# Altium PCB main.PcbDoc
Units mm, origin at the board's own origin, x right, y up, seen from the top; angles counter-clockwise.
Board outline 20.01 x 24.12 mm, 2 copper layers (Top Layer, Bottom Layer); 19 components, 18 nets, 85 pads, 23 vias.
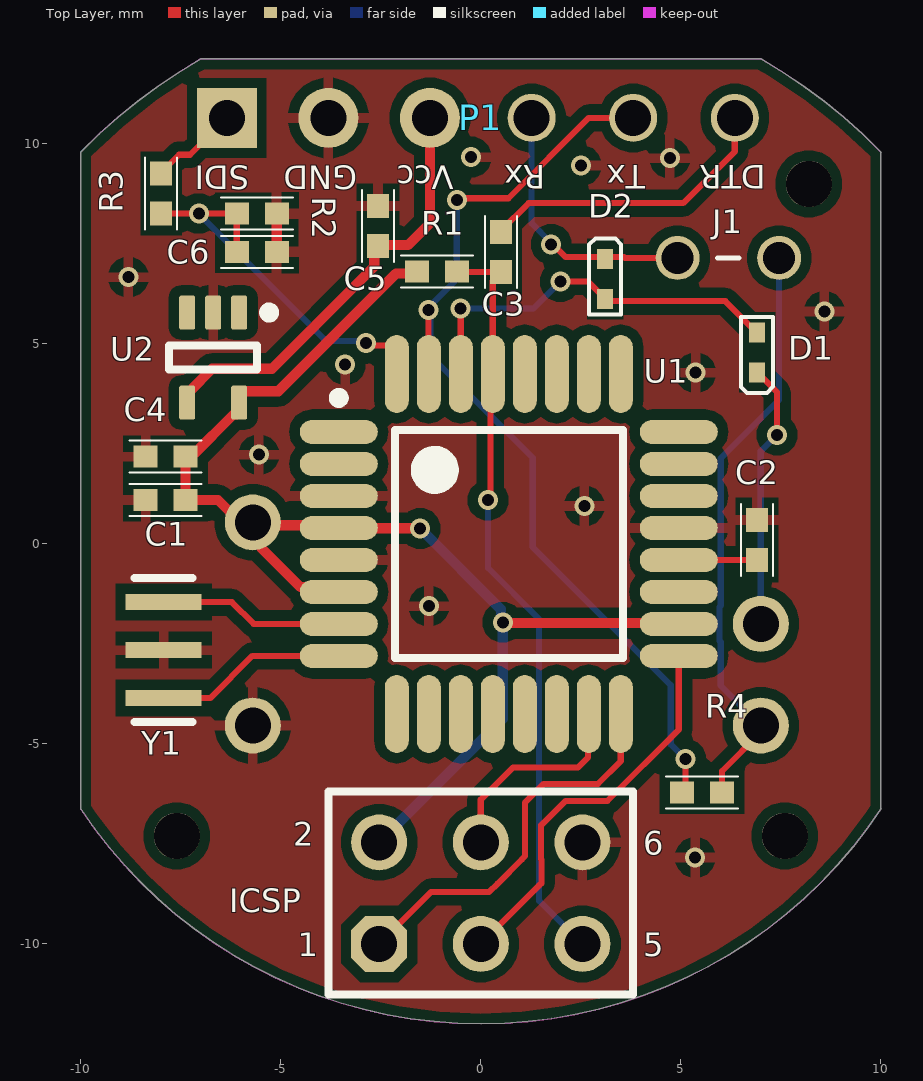
[diagram p0: Top Layer view]
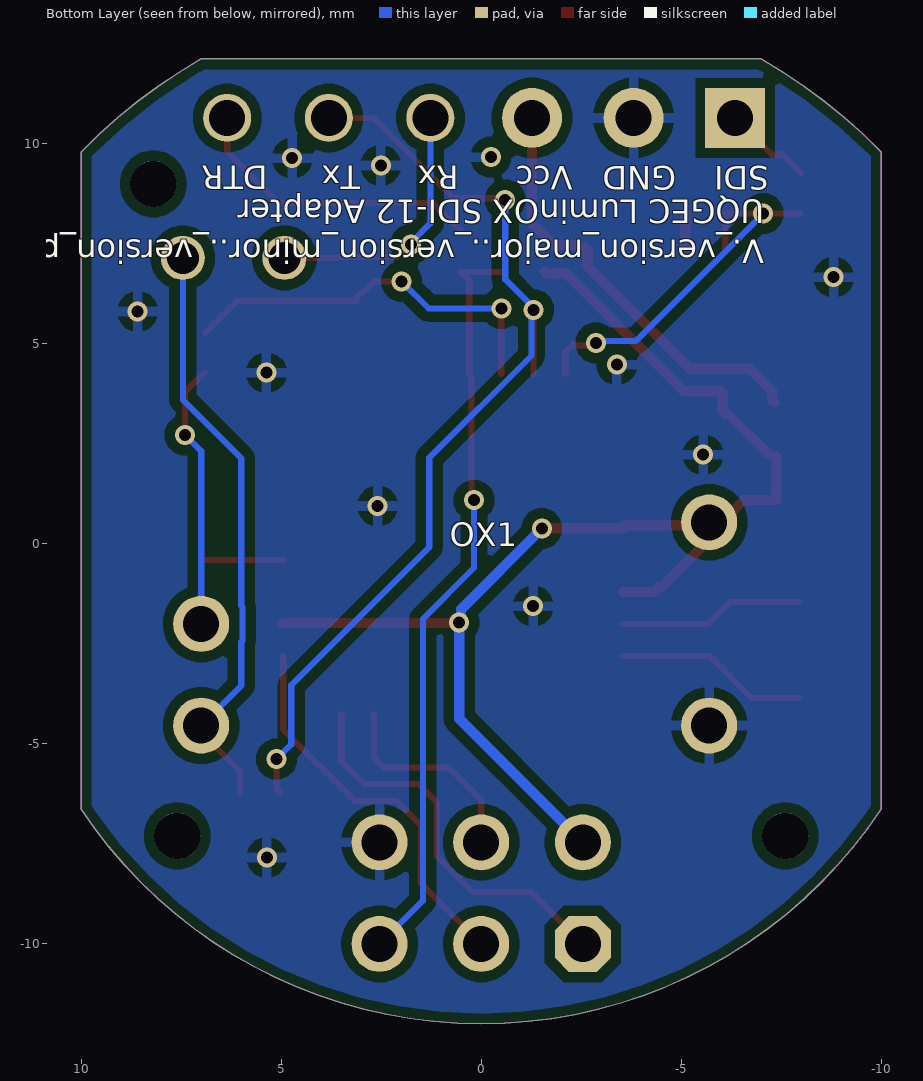
[diagram p1: Bottom Layer view, seen from below]
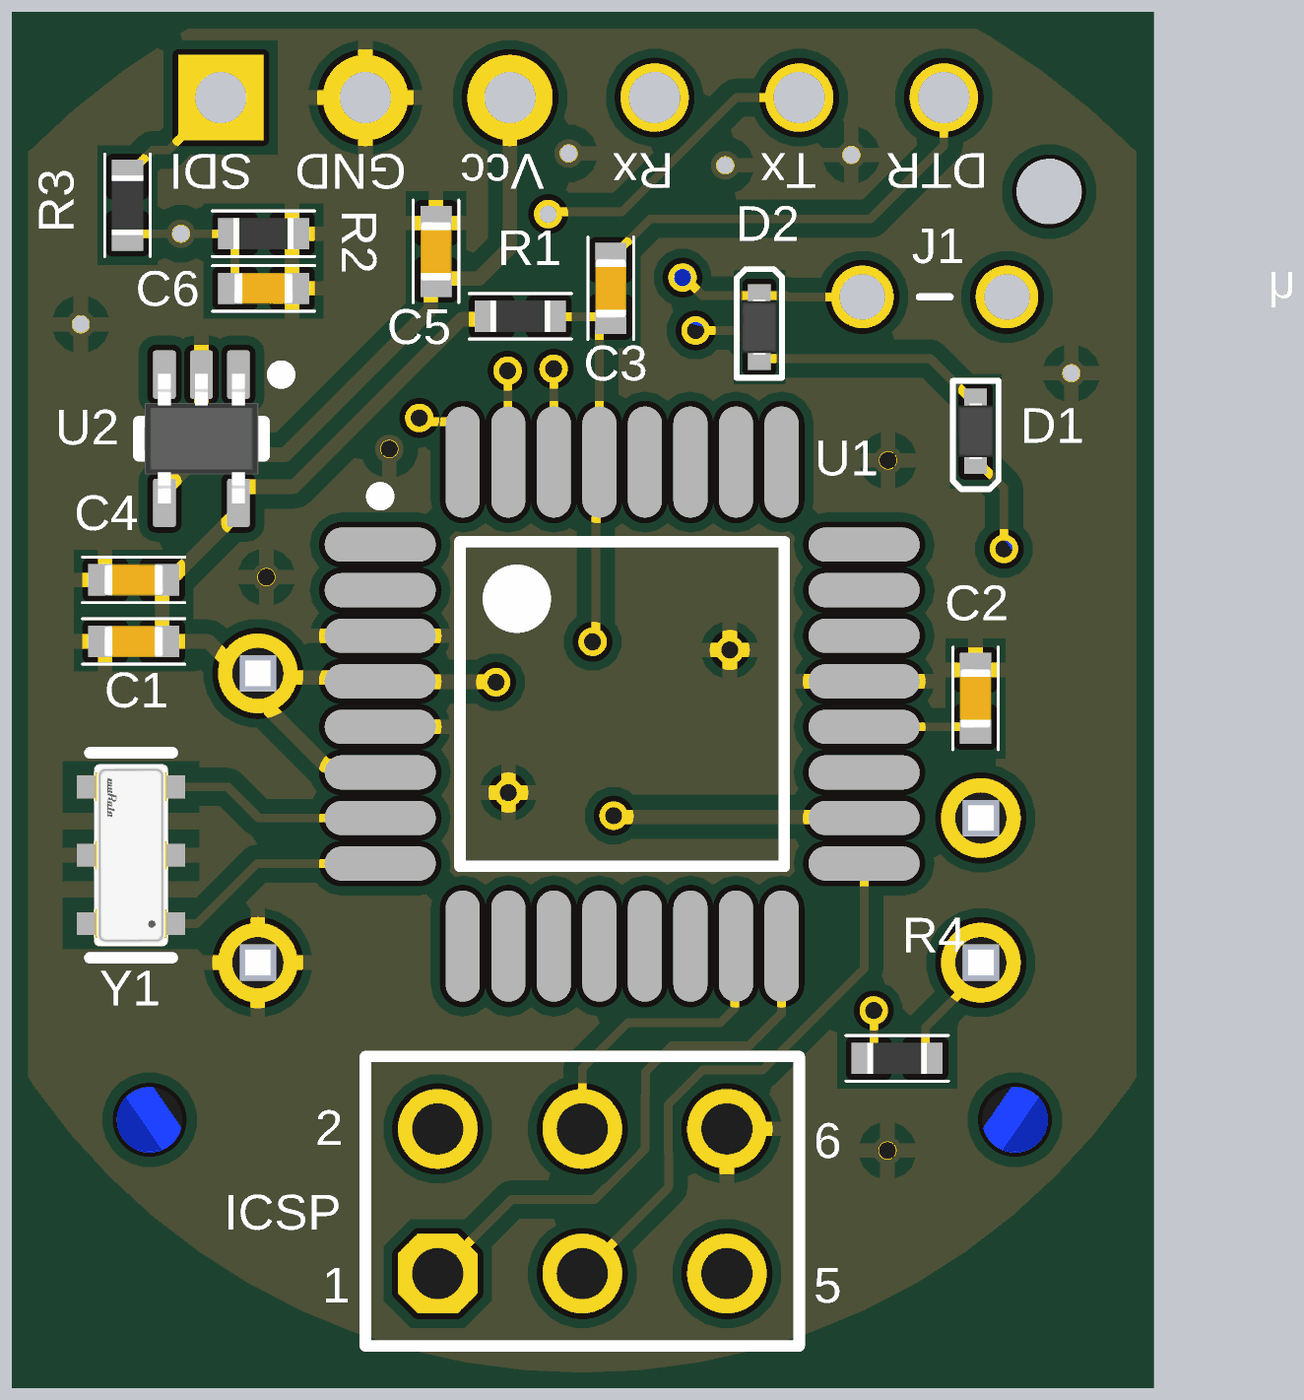
[diagram p2: 3D render of the assembled board from above, using the file's embedded part models]

## Layer stack, top to bottom
Top Solder: solder mask 0.0102, Solder Resist, Dk 3.5
Top Layer: signal copper 0.0356
Dielectric 1: dielectric 0.32, FR-4, Dk 4.8
Bottom Layer: signal copper 0.0356
Bottom Solder: solder mask 0.0102, Solder Resist, Dk 3.5

## Board outline
-9.996,-6.629 ccw(c0.004,0.004) 10.01,-6.62 10.004,-6.615 10.004,9.798 10.008,9.798 ccw(c0.004,0.004) 7.004,12.128 -6.996,12.128 ccw(c0.004,0.004) -9.996,9.802

## Design rules (kind name [scope] priority, off if disabled: settings)
Clearance [All] p1: gap=0.254 ignorepadtopadclearanceinfootprint=TRUE except(0: Arc-Hole Track-Hole SMDPad-Hole THPad-Hole Via-Hole Fill-Hole Poly-Hole Region-Hole Text-Hole)
HoleSize [All] p1: absolutevalues=TRUE maxlimit=6.3 minlimit=0.3 maxpercent=80.000 minpercent=20.000
PlaneConnect [All] p1: planeconnectstyle=Relief reliefexpansion=0.508 reliefentries=4 reliefconductorwidth=0.3 reliefairgap=0.254
PolygonConnect [All] p1: connectstyle=Relief reliefconductorwidth=0.254 reliefentries=4 polygonreliefangle="90 Angle" airgapwidth=0.254
RoomDefinition main [InComponentClass('main')] p1: confinementstyle=ConfineIn formatcopy=TRUE lockcomponents=FALSE outline -10.318,-12.318 -10.318,8.317 -8.719,8.317 -8.719,9.939 -7.456,9.939 -7.456,11.756 7.306,11.756 7.306,8.317 10.318,8.317 10.318,-12.318
RoutingVias [All] p1: holewidth=0.3 width=0.6 viastyle="Through Hole" minholewidth=0.3 minwidth=0.5 maxholewidth=1 maxwidth=2
SolderMaskExpansion [All] p1: expansion=0.102 istentingtop=FALSE
UnConnectedPin [All] p1:
UnRoutedNet [All] p1: checkbadconnections=TRUE
Width [All] p1: maxlimit=5 minlimit=0.152 preferedwidth=0.305 minimp=50.000000 maximp=50.000000 favimp=50.000000
27 further rules are at their usual default settings.

## Components (designator, comment, footprint, x,y, rotation, side; value= is the part's Value field where it differs from the comment)
C1 "100nF" C0402_CAPC1005X06N -7.88,1.1 r0 top
C2 "100nF" C0402_CAPC1005X06N 6.907,0.1 r270 top
C3 "100nF" C0402_CAPC1005X06N 0.5,7.3 r270 top
C4 "470nF" C0402_CAPC1005X06N -7.88,2.18 r0 top
C5 "100nF" C0402_CAPC1005X06N -2.57,7.95 r270 top
C6 "220pF" C0402_CAPC1005X06N -5.6,7.3 r0 top
D1 "D Schottky" SOD923_SODFL98X40-2N 6.91,4.79 r90 top
D2 "D Schottky" SOD923_SODFL98X40-2N 3.11,6.62 r270 top
ICSP "ICSP" HDR2X3 -2.54,-10 r0 top
J1 "" HDR1X2 4.92,7.15 r0 top
OX1 "LOX-02-S" LOX-02-S 0,-2 r180 bottom locked
P1 "FTDI" HDR1X6 -6.35,10.65 r0 top
R1 "10K" R0402-RESC1005X04N -1.09,6.81 r180 top
R2 "160K" R0402-RESC1005X04N -5.6,8.26 r180 top
R3 "160K" R0402-RESC1005X04N -7.99,8.76 r90 top
R4 "1K" R0402-RESC1005X04N 5.53,-6.22 r0 top
U1 "ATmega328P-AU" 32A_M 0.7,0 r0 top
U2 "TPS71550DCKR" DCK0005A_N -6.69,4.66 r270 top
Y1 "CSTNE16M0V530000R0" FP-CSTNE16M0V530000R0-MFG -7.927,-2.654 r270 top

## Footprints (in the part's own frame and the unit in brackets; to place one, negate y for a bottom-side part, rotate by r counter-clockwise, add the part's x,y. Pads: shape width x height; smd on the part's side, far side on the other; paste and mask are expansions set on the pad)
32A_M [mm] "Thin QFP, 32-Leads, Body 7x7mm, Pitch 0.8mm, IPC Low Density"
  oval 1.95x0.6 smd: 1(-4.25,2.8) 2(-4.25,2) 3(-4.25,1.2) 4(-4.25,0.4) 5(-4.25,-0.4) 6(-4.25,-1.2) 7(-4.25,-2) 8(-4.25,-2.8) 17(4.25,-2.8) 18(4.25,-2) 19(4.25,-1.2) 20(4.25,-0.4) 21(4.25,0.4) 22(4.25,1.2) 23(4.25,2) 24(4.25,2.8)
  oval 0.6x1.95 smd: 9(-2.8,-4.25) 10(-2,-4.25) 11(-1.2,-4.25) 12(-0.4,-4.25) 13(0.4,-4.25) 14(1.2,-4.25) 15(2,-4.25) 16(2.8,-4.25) 25(2.8,4.25) 26(2,4.25) 27(1.2,4.25) 28(0.4,4.25) 29(-0.4,4.25) 30(-1.2,4.25) 31(-2,4.25) 32(-2.8,4.25)
  silkscreen extent -4.37,-2.85 2.85,3.77, body extent -3.5,-3.5 3.5,3.5, height 1.2
C0402_CAPC1005X06N [mm] "Chip Capacitor 0402 (Metric 1005), 2-Leads, Body 1.00x0.50mm, IPC Medium Density"
  rect 0.6x0.55 smd: 1(-0.5,0) 2(0.5,0)
  silkscreen extent -0.9,-0.4 0.9,0.4, body extent -0.53,-0.28 0.53,0.28, height 0.55
DCK0005A_N [mm] "SOT23, 5-Leads, Body 2.15x1.4mm, Pitch 0.65mm, IPC Medium Density"
  rrect25% 0.85x0.4 smd: 1(-1.125,0.65) 2(-1.125,0) 3(-1.125,-0.65) 4(1.125,-0.65) 5(1.125,0.65)
  silkscreen extent -1.25,-1.1 0.3,1.53, body extent -1.14,-1 1.14,1, height 0.94
FP-CSTNE16M0V530000R0-MFG [mm]
  rect 0.4x1.9 smd paste+0 mask+0: 1(1.2,0) 2(0,0) 3(-1.2,0)
  silkscreen extent -1.8,-0.72 1.8,0.73, body extent -1.78,-1.05 1.78,1.05, height 0.25
HDR1X2 [mm] "Connector; Header; 2 Position"
  round 1.1 hole 0.8: 1(0,0) 2(2.54,0)
HDR1X6 [mm] "Connector; Header; 6 Position"
  rect 1.5x1.5 hole 0.9: 1(0,0)
  round 1.5 hole 0.9: 2(2.54,0) 3(5.08,0)
  round 1.2 hole 0.9: 4(7.62,0) 5(10.16,0) 6(12.7,0)
HDR2X3 [mm] "Connector; Header; 3x2 Position"
  oct 1.4x1.4 hole 0.9: 1(0,0)
  round 1.4 hole 0.9: 2(0,2.54) 3(2.54,0) 4(2.54,2.54) 5(5.08,0) 6(5.08,2.54)
  silkscreen extent -1.27,-1.27 6.35,3.81
LOX-02-S [mm] "LuminOX Oxygen Serial (UART) Sonsor Footprint"
  round 1.4 hole 0.9 paste+0: 1(5.7,2.54) 2(5.7,-2.54) 3(-7,0) 4(-7,-2.54)
  body extent -9.95,-9.95 9.95,9.95, height 14.05
R0402-RESC1005X04N [mm] "Chip Resistor 0402 (Metric 1005), 2-Leads, Body 1.00x0.50mm, IPC Medium Density"
  rect 0.6x0.55 smd: 1(-0.5,0) 2(0.5,0)
  silkscreen extent -0.9,-0.4 0.9,0.4, body extent -0.53,-0.28 0.53,0.28, height 0.4
SOD923_SODFL98X40-2N [mm] "SODFL, 2-Leads, Body 0.60x0.98mm, IPC Medium Density"
  rect 0.5x0.4 smd: 1(0.5,0) 2(-0.5,0)
  silkscreen extent -1.02,-0.4 0.89,0.4, body extent -0.49,-0.33 0.49,0.33, height 0.4

## Part data
C1 C2 C3 C4 C5 C6: library part "Cap Semi", "Capacitor (Semiconductor SIM Model)", LatestRevisionDate=29-May-2009, LatestRevisionNote="IPC-7351 Footprint Added.", PackageDescription="Chip Capacitor", PackageReference=C1206, Published=8-Jun-2000, Publisher="Altium Limited"
D1 D2: "DIODESCHOTTKY30V100MAVMN2M", Average Rectified Current=100mA, Case/Package=SMD/SMT, Manufacturer=Rohm, Manufacturer Part Number=RB521CM-30T2R, Max Reverse Voltage (DC)=30V, Supplier Part Number 1=755-RB521CM-30T2R, Category="Rectifier Diodes", Code_JEDEC=DO-214-AA, ComponentLink1Description=http://www.mouser.com/ds/2/348/rb521cm-30-e-907574.pdf?src-supplier=Mouser, ComponentLink1URL=http://www.mouser.com/ds/2/348/rb521cm-30-e-907574.pdf?src-supplier=Mouser, ComponentLink2Description=http://www.farnell.com/datasheets/2644371.pdf?src-supplier=Farnell, ComponentLink2URL=http://www.farnell.com/datasheets/2644371.pdf?src-supplier=Farnell, ComponentLink3Description=http://www.rohm.com/web/global/datasheet/RB521CM-30/rb521cm-30t2r-e?src-supplier=Digikey, ComponentLink3URL=http://www.rohm.com/web/global/datasheet/RB521CM-30/rb521cm-30t2r-e?src-supplier=Digikey, ComponentLink4Description=http://www.farnell.com/datasheets/2644371.pdf?src-supplier=Newark, ComponentLink4URL=http://www.farnell.com/datasheets/2644371.pdf?src-supplier=Newark, ComponentLink5Description=https://www.rohm.com/datasheet/RB521CM-30/rb521cm-30t2r-e?src-supplier=Digikey, ComponentLink5URL=https://www.rohm.com/datasheet/RB521CM-30/rb521cm-30t2r-e?src-supplier=Digikey, LatestRevisionDate=17-Jul-2002, LatestRevisionNote="Re-released for DXP Platform.", Mount="Surface Mount", Number of Pins=2, PackageDescription="DO-214-AA/SMB; 2 C-Bend Leads; Body 5.3 x 3.6 mm, inc. leads (LxW)", PackageReference=SMB, Packaging="Cut Tape", Pricing 1="1=0.2, 10=0.143, 50=0.143, 100=0.087, 1000=0.062, 10000=0.04 (USD)", Published=8-Jun-2000, Publisher="Altium Limited", RoHS=Yes, RoHS Compliant=Yes, Series=-, Stock 1=103883, Supplier 1=Mouser
ICSP: library part "Header 3X2", "Header, 3-Pin, Dual row", LatestRevisionDate=17-Jul-2002, LatestRevisionNote="Re-released for DXP Platform.", Publisher="Altium Limited"
J1: library part "Header 2", "Jumper to short FTDI TX to LuminOX RX to initiate Polling mode for initial MCU programming", LatestRevisionDate=17-Jul-2002, LatestRevisionNote="Re-released for DXP Platform.", Publisher="Altium Limited"
OX1: "LuminOx optical oxygen sensor; range: 25%; supply: 4.5-5.5VDC; working temperature: -30+60 deg.C; response time: 30s;...", Manufacturer="SST Sensing", Manufacturer Part Number=LOX-02-S, Pricing 1="1=138.36, 10=120.95, 50=115.92, 100=115.92, 1000=115.92, 10000=115.92 (USD)", Stock 1=5, Supplier 1=Mouser
P1: library part "Header 6", "Header, 6-Pin", LatestRevisionDate=17-Jul-2002, LatestRevisionNote="Re-released for DXP Platform.", Publisher="Altium Limited"
R1 R2 R3 R4: library part "Res Semi", "Semiconductor Resistor", LatestRevisionDate=17-Jul-2002, LatestRevisionNote="Re-released for DXP Platform.", PackageDescription="Axial Device, Thru-Hole; 2 Leads; 0.5 in Pin Spacing", PackageReference=AXIAL-0.5, Published=8-Jun-2000, Publisher="Altium Limited"
U1: library part CMP-0095-00269-2, "8-bit AVR Microcontroller, 32KB Flash, 1KB EEPROM, 2KB SRAM, 32-pin TQFP, Industrial Grade (-40°C to 85°C)", Code_JEDEC=MS-026-ABA, ComponentLink1Description="Manufacturer URL", ComponentLink1URL=http://www.atmel.com/, ComponentLink2Description="ATmega48A/48PA/88A/88PA/168A/168PA/328/328P Datasheet", ComponentLink2URL=http://www.atmel.com/dyn/resources/prod_documents/doc8271.pdf, ComponentLink3Description="ATmega48A/48PA/88A/88PA/168A/168PA/328/328P Summary", ComponentLink3URL=http://www.atmel.com/dyn/resources/prod_documents/8271S.pdf, DatasheetVersion="revD, May-2011", PackageDescription="32-Lead, 7x7x1.0 mm Body, 0.8mm Lead Pitch, Thin Profile Plastic Quad Flat Package (TQFP)", PackageReference=32A, PackageVersion="revC, Oct-2010", RevisionNote="DatasheetVersion & PackageVersion updated. URLs added."
U2: library part CMP-0394-00921-2, "Single Output LDO, 50 mA, Fixed 5 V Output, 3 to 24 V Input, 5-pin SC70 (DCK), -40 to 85 degC, Green (RoHS & no Sb/Br)", Manufacturer="Texas Instruments", Accuracy(%)=4, Code_JEDEC=MO-203, ComponentLink1Description="Manufacturer URL", ComponentLink1URL=http://www.ti.com/, ComponentLink2Description=Datasheet, ComponentLink2URL=http://www.ti.com/general/docs/lit/getliterature.tsp?genericPartNumber=TPS71550&fileType=pdf, ComponentLink3Description="Package Specification", ComponentLink3URL=http://www.ti.com/litv/pdf/mpds025f, DatasheetVersion=SLVS338P, Eco-Plan="Green (RoHS & no Sb/Br)", Fixed Output Options(V)=5, Iout(Max)(A)=0.05, Iq(Typ)(mA)=0.003, Mounting Technology="Surface Mount", PackageDescription="5-Pin Plastic Small-Outline, Body 2 x 1.25 mm, Pitch 0.65 mm", PackageReference=DCK0005A, PackageVersion=4093553-3/G, PartNumber=TPS71550DCKR, SubFamily="Single Channel LDO", Vdo(Typ)(mV)=415, Vin(Max)(V)=24, Vin(Min)(V)=3, Vout Adj(Max)(V)=5, Vout Adj(Min)(V)=5
Y1: library part CMP-06054-000001-1, "CERAMIC RES 16.0000MHZ 15PF SMD", Frequency=16MHz, Load Capacitance=15pF, Manufacturer=Murata, Package=0, Temperature="-40°C to +85°C", Temperature Range High=+85°C, Temperature Range Low=-40°C, Tolerance=0.5%, Automotive=No, Category=Crys, ComponentLink2Description=Datasheet, ComponentLink2URL=https://www.murata.com/en-sg/products/productdata/8801162231838/SPEC-CSTNE16M0V530000R0.pdf?1545967809000, Device Class L1="Passive Components", Device Class L2="Crystals / Oscillators", Device Class L3=Crystals, Digikey Description="CERAMIC RES 16.0000MHZ 15PF SMD", Esr=40Ω, Height=1mm, Lead Free=Yes, Manufacturer Part Number=CSTNE16M0V530000R0, Mouser Description="Ceramic Resonator 16MHz ±0.5% (Tol) ±0.3% (Stability) 15pF 40Ohm 3-Pin CSMD T/R", Octopart=https://octopart.com/cstne16m0v530000r0-murata-91406924, RoHS=TRUE, Series=CSTNE_V, Stability=0.3%

## Free pads (board coordinates)
  round 1.152 hole 1.152 unplated mask+0.074: ""(-7.6,-7.3) ""(7.6,-7.3) ""(8.2,9)

## Via types
v1: diameter 0.5, hole 0.3, Top Layer to Bottom Layer, 11 vias
v2: diameter 0.5, hole 0.3, Top Layer to Bottom Layer, tented both sides, 10 vias
v3: diameter 0.5, hole 0.3, Top Layer to Bottom Layer, tented bottom, 2 vias

## Nets (pads, with @x,y where several pads share a name; then routed paths per layer and width w, separated by ;. In a path a pad name is that pad's centre, name@x,y a point inside that pad or via, vN(x,y) a via of type N, cw(c..) or ccw(c..) an arc to the next point about the centre after c; other vN are vias at no path point)
+5: C1.2 C4.2 ICSP.2 OX1.1 R1.2 U1.4 U1.6 U1.18 U2.5 | length 32.4
  Top Layer w0.254: C4.2 C1.2 -6.57,1.1 -6.01,0.54 OX1.1 OX1.1@-5.626,0.466 ; C4.2@-7.2,2.22 -6.183,3.237 -6.113,3.237 -6.04,3.31 U2.5 -6.04,3.76 -5.982,3.818 -5.062,3.818 -2.122,6.758 -1.642,6.758 R1.2 ; U1.6 -4.319,-1.2 -4.438,-1.081 -4.507,-1.081 -5.481,-0.107 -5.481,0.321 OX1.1@-5.626,0.466 ; v1(-1.515,0.385) -1.523,0.392 -3.542,0.392 -3.616,0.466 OX1.1@-5.626,0.466 ; v1(0.55,-1.96) 0.57,-1.98 4.93,-1.98 U1.18
  Bottom Layer w0.254: ICSP.2 0.55,-4.37 v1(0.55,-1.96) 0.503,-1.913 0.503,-1.633 v1(-1.515,0.385)
AREF: C2.2 U1.20 | length 2
  Top Layer w0.152: U1.20 C2.2
DTR: C3.1 P1.6 | length 7.5
  Top Layer w0.152: C3.1 0.5,7.825 1.195,8.52 5.06,8.52 6.35,9.81 P1.6
FTDI_RX: P1.5 R4.1 U1.31 | length 24.7
  Top Layer w0.152: v1(-1.312,5.854) -1.306,5.847 -1.306,4.256 U1.31 ; v3(-0.6,8.604) -0.561,8.643 0.693,8.643 2.7,10.65 P1.5 ; R4.1 5.12,-6.13 v1(5.12,-5.38)
  Bottom Layer w0.152: v3(-0.6,8.604) -0.6,6.613 -1.312,5.9 v1(-1.312,5.854) -1.257,5.798 -1.257,4.707 1.3,2.15 1.3,-0.081 4.75,-3.531 4.75,-5.01 v1(5.12,-5.38)
FTDI_TX: D2.2 J1.1 P1.4 | length 6.7
  Top Layer w0.152: v3(1.76,7.49) 1.801,7.49 2.119,7.172 3.579,7.172 3.601,7.15 J1.1
  Bottom Layer w0.152: P1.4 1.27,8.013 1.76,7.523 v3(1.76,7.49)
GND: C1.1 C2.1 C4.1 C5.1 C6.2 ICSP.6 OX1.2 P1.2 R2.1 U1.3 U1.5 U1.21 U2.2 Y1.2 | length 1
  Top Layer w0.254: C6.2 R2.1
  other v1: -1.3,-1.554 2.59,0.95
  other v2: 5.36,-7.84 -5.55,2.23 5.37,4.28 -3.39,4.48 8.59,5.81 -8.81,6.67 2.51,9.46 4.725,9.643 -0.24,9.67
MISO: ICSP.1 U1.16 | length 9.9
  Top Layer w0.152: ICSP.1 -1.24,-8.7 0.21,-8.7 0.42,-8.49 0.427,-8.49 1.03,-7.887 1.03,-7.88 1.103,-7.807 1.103,-6.865 1.11,-6.858 1.11,-6.46 1.57,-6 2.93,-6 3.5,-5.43 U1.16
MOSI: ICSP.4 U1.15 | length 5.3
  Top Layer w0.152: ICSP.4 0,-6.394 0.801,-5.594 2.426,-5.594 2.676,-5.344 2.676,-4.274 U1.15
NetP1_1: P1.1 R3.2 | length 2.2
  Top Layer w0.152: R3.2 -7.99,9.285 -7.545,9.73 -7.27,9.73 P1.1
NetU1_7: U1.7 Y1.3 | length 4.6
  Top Layer w0.152: Y1.3 -6.226,-1.454 -5.68,-2 U1.7
NetU1_8: U1.8 Y1.1 | length 4.8
  Top Layer w0.152: Y1.1 -6.764,-3.854 -5.71,-2.8 U1.8
OX_RX: J1.2 OX1.4 R4.2 | length 14.8
  Top Layer w0.152: R4.2 6.03,-5.68 7,-4.71 OX1.4
  Bottom Layer w0.152: OX1.4 6,-3.54 6,-2.457 5.97,-2.427 5.97,-1.573 6,-1.543 6,2.14 7.46,3.6 J1.2
OX_TX: D1.2 OX1.3 | length 6.7
  Top Layer w0.152: D1.2 7.406,3.794 v1(7.406,2.725)
  Bottom Layer w0.152: OX1.3 7,2.319 v1(7.406,2.725)
RESET: C3.2 ICSP.5 R1.1 U1.29 | length 19
  Top Layer w0.152: R1.1@-0.59,6.8 C3.2 0.5,6.775 0.3,6.575 U1.29 0.24,4.19 0.24,1.154 v1(0.18,1.094)
  Bottom Layer w0.152: v1(0.18,1.094) 0.18,-0.6 1.46,-1.88 1.46,-8.92 ICSP.5
SCK: ICSP.3 U1.17 | length 9.9
  Top Layer w0.152: ICSP.3 1.516,-8.484 1.516,-7.893 1.51,-7.887 1.51,-7.033 2.12,-6.423 3.167,-6.423 4.95,-4.64 U1.17
SDI-12: C6.1 R2.2 R3.1 U1.32 | length 9.8
  Top Layer w0.152: R3.1 v2(-7.05,8.26) R2.2 C6.1 ; v1(-2.865,5.025) -2.798,4.958 -2.307,4.958 -2.307,5.003 -2.1,4.797 U1.32
  Bottom Layer w0.152: v2(-7.05,8.26) -3.86,5.07 -2.91,5.07 v1(-2.865,5.025)
U_RXD: D1.1 D2.1 U1.30 | length 9.9
  Top Layer w0.152: v1(-0.504,5.888) -0.502,5.886 -0.502,4.252 U1.30 ; v1(1.99,6.56) 2.686,6.56 2.953,6.294 2.986,6.294 3.11,6.17 3.11,6.069 6.111,6.069 D1.1@6.9,5.28
  Bottom Layer w0.152: v1(-0.504,5.888) 1.318,5.888 v1(1.99,6.56)
VCC: C5.2 P1.3 U2.4 | length 10.7
  Top Layer w0.254: U2.4 -7.267,3.608 -7.267,3.833 -6.721,4.379 -5.219,4.379 -2.662,6.936 -2.662,7.358 C5.2 ; C5.2@-2.39,7.47 -1.82,7.47 -1.27,8.02 P1.3
pads on no net: U1.1 U1.2 U1.9 U1.10 U1.11 U1.12 U1.13 U1.14 U1.19 U1.22 U1.23 U1.24 U1.25 U1.26 U1.27 U1.28 U2.1 U2.3

## Polygon pours and split planes (outlines as drawn)
GND on Bottom Layer "GND_L02_P001" (solid, remove dead copper, pour order 1): -9.99,-6.649 ccw(c0,0) 10.009,-6.619 10.008,-6.619 10.008,9.79 10.009,9.789 ccw(c0,0) 7,12.124 -7,12.124 ccw(c0,0) -10,9.798
GND on Top Layer "GND_L01_P000" (solid, remove dead copper, pour order 0): -9.99,-6.649 ccw(c0,0) 10.009,-6.619 10.008,-6.619 10.008,9.79 10.009,9.789 ccw(c0,0) 7,12.124 -7,12.124 ccw(c0,0) -10,9.798

## Keep-outs
Keep-Out Layer:
  lines w0.01: 10.003,9.793 10.003,-6.629 cw(c0,0) -10,-6.633 -10,9.798 cw(c0,0) -7,12.124 7,12.124 cw(c0,0) 10.004,9.794

## Silkscreen, mask and mechanical layers (free items; w line width, h text height)
Top Overlay:
  lines w0.127: 5.92,7.15 6.46,7.15
  text "Rx" at 1.61,9.67 h1 r180
  text "Tx" at 4.109,9.67 h1 r180
  text "DTR" at 7.127,9.67 h1 r180
  text "SDI" at -5.79,9.659 h1 r180
  text "GND" at -3.09,9.659 h1 r180
  text "Vcc" at -0.672,9.66 h1 r180
Bottom Overlay:
  text "SDI" at -7.187,9.646 h1 r180
  text "GND" at -4.876,9.646 h1 r180
  text "Vcc" at -2.283,9.647 h1 r180
  text "Rx" at 0.565,9.657 h1 r180
  text "Tx" at 3.026,9.657 h1 r180
  text "DTR" at 5.338,9.657 h1 r180
  text "V._version_major.._version_minor.._version_patch / UQGEC LuminOX SDI-12 Adapter" at -7.08,8.8 h1 r180
Mechanical 1:
  lines w0.127: -9.996,-6.652 -9.996,9.802 cw(c0.004,0.004) -6.996,12.128 7.004,12.128 cw(c0.004,0.004) 10.008,9.798 ; -9.996,-6.629 ccw(c0.004,0.004) 10.01,-6.62 ; 10.004,-6.615 10.004,9.798

## Text inside footprints (layer, text, board x,y; h text height)
ICSP: Top Overlay "1" at -4.572,-10.508 h1; Top Overlay "5" at 4.064,-10.508 h1; Top Overlay "6" at 4.064,-7.968 h1; Top Overlay "2" at -4.693,-7.743 h1